# EAGLE board RFID_Antenna-Panel (EAGLE 9.3.0)
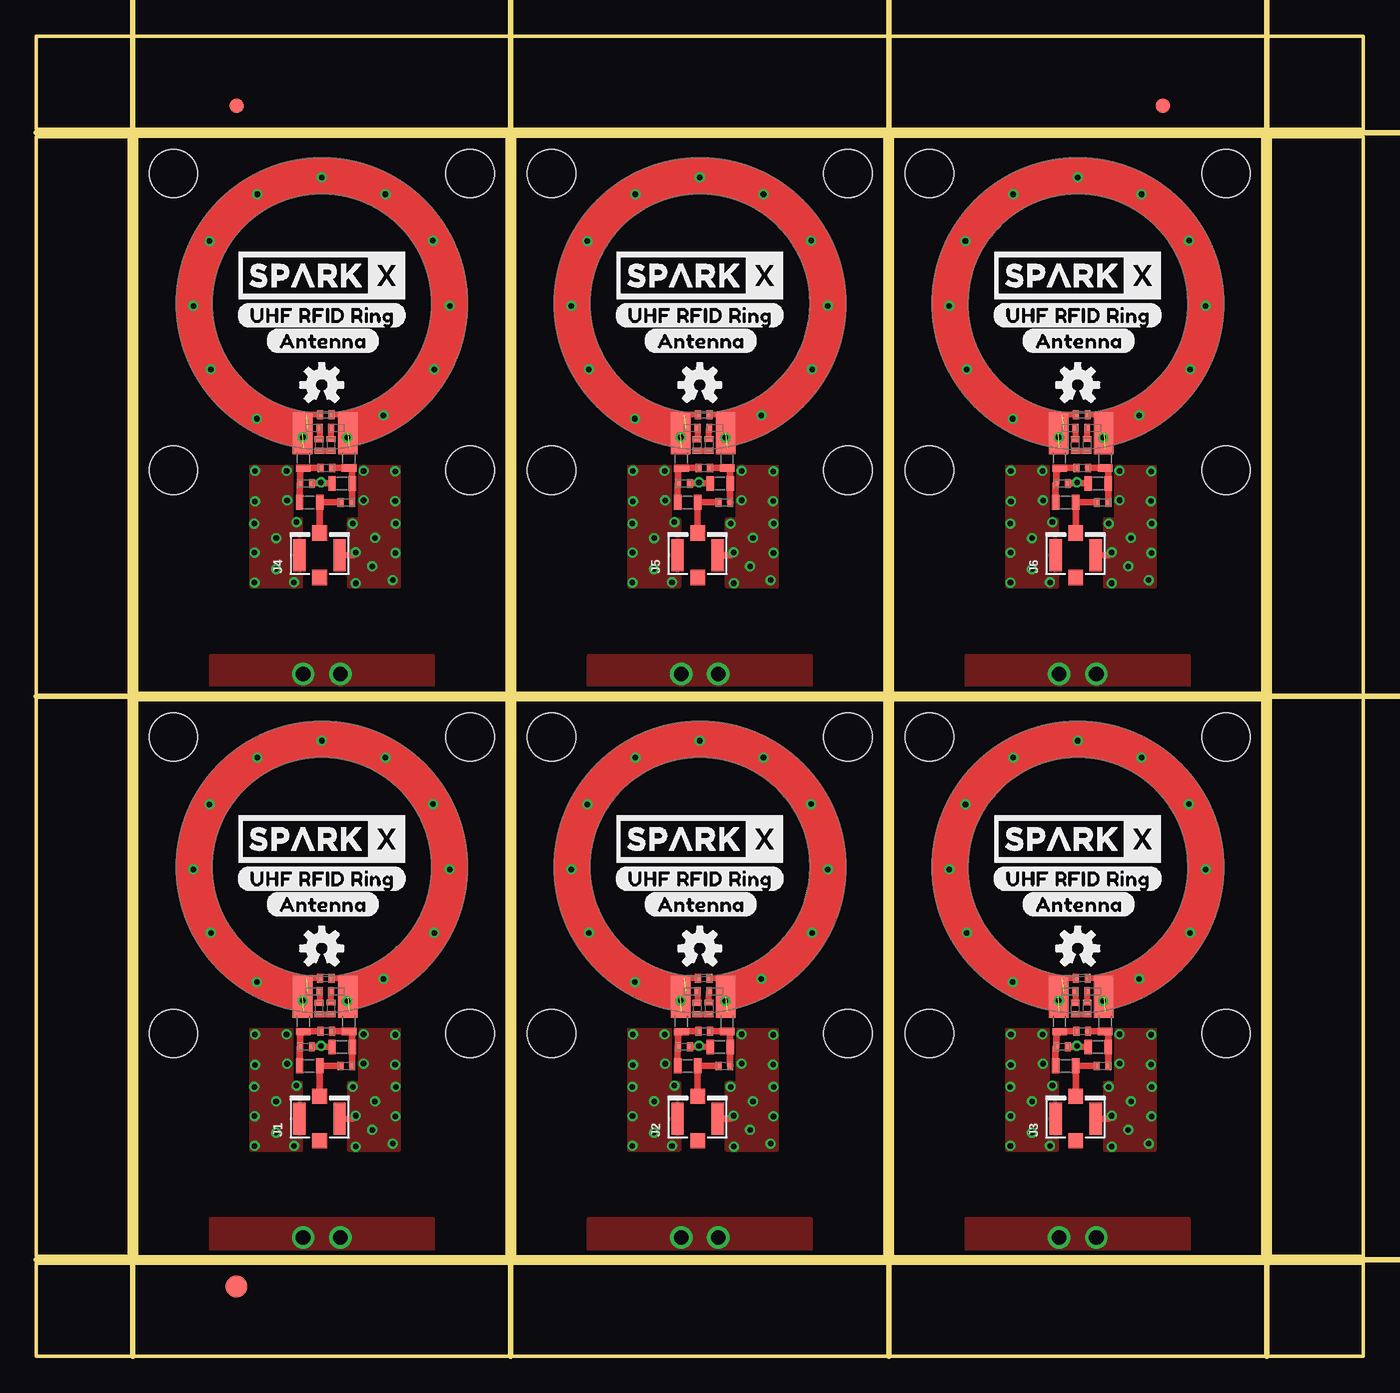
[diagram p0: board, top side]
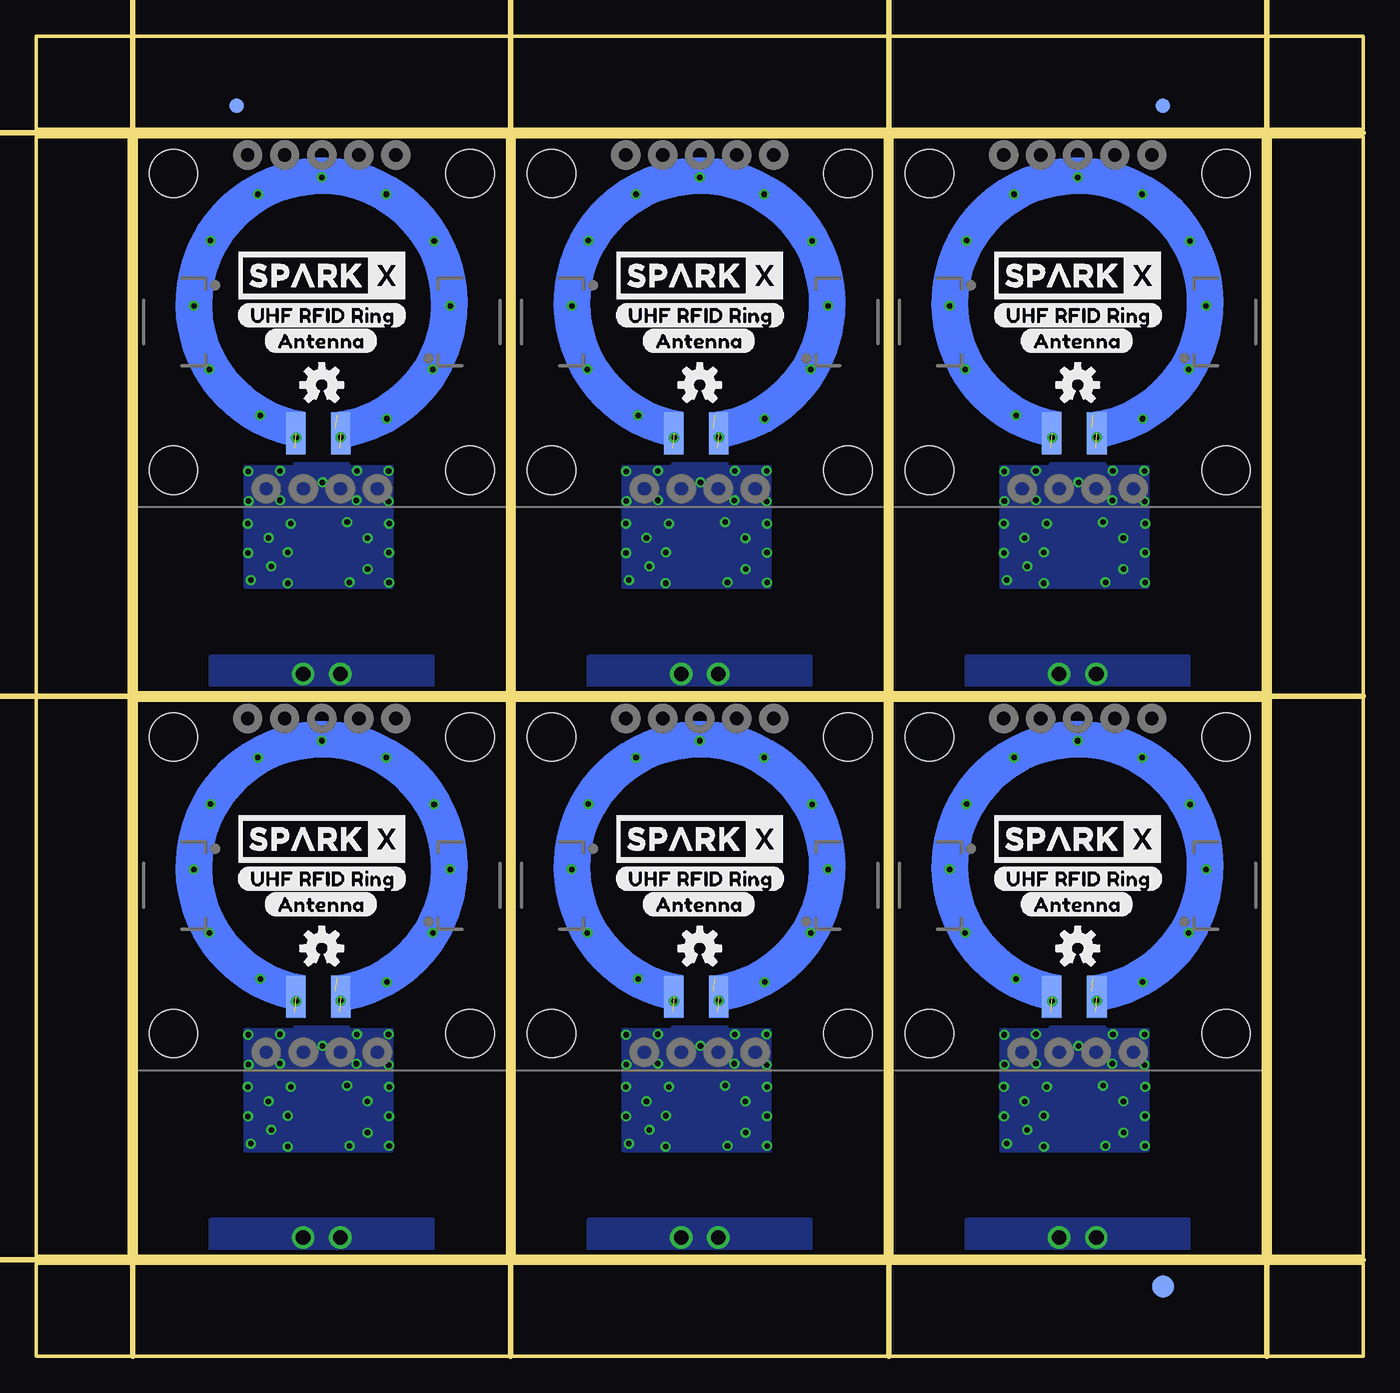
[diagram p1: board, bottom side, seen from below]

Size 90.93 x 90.42 mm. Coordinates in mm from the lower left corner, seen from the top.
Outline: 6.86,6.86 32.26,6.86 32.26,44.96 6.86,44.96 6.86,6.86
Outline: 32.77,6.86 58.17,6.86 58.17,44.96 32.77,44.96 32.77,6.86
Outline: 58.67,6.86 84.07,6.86 84.07,44.96 58.67,44.96 58.67,6.86
Outline: 6.86,45.47 32.26,45.47 32.26,83.57 6.86,83.57 6.86,45.47
Outline: 32.77,45.47 58.17,45.47 58.17,83.57 32.77,83.57 32.77,45.47
Outline: 58.67,45.47 84.07,45.47 84.07,83.57 58.67,83.57 58.67,45.47
Outline: 0,6.35 90.93,6.35 90.93,0 0,0 0,6.35
Outline: 84.58,83.57 90.93,83.57 90.93,6.86 84.58,6.86 84.58,83.57
Outline: 0,90.42 90.93,90.42 90.93,84.07 0,84.07 0,90.42
Outline: 0,83.57 6.35,83.57 6.35,6.86 0,6.86 0,83.57
Copper layers (1*16): Top 0.035mm / dielectric 1.5mm / Bottom 0.035mm
Design rules "SparkFun-2-layer-PCBWay-LIMIT": minimum track width 6mil, minimum drill 0.3mm, track to track 6mil, track to pad 6mil, pad to pad 6mil, via to via 6mil, smd to smd 6mil, copper to edge 6mil, drill to drill 6mil, minimum pad ring 6mil, minimum via ring 6mil, stop-mask expansion 4mil, vias tented up to drill 25mil, thermal gap 10mil
Milling: 7 lines

## Footprints (pad centres in the part's own frame; a part is rotated, then mirrored left to right if it is on the bottom)
0402_MURATA = smd 0.4 x 0.6: P$1 -0.4,0; P$2 0.4,0
FIDUCIAL-1X2 = smd 1 x 1: 1 0,0
FIDUCIAL-1.5X3 = smd 1.5 x 1.5: 1 0,0
U.FL = smd 2.2 x 0.85: 1 0,1.375; 2 0,-1.375 | smd 1.05 x 1: FEED 1.525,0; NC -1.525,0
0603_MURATA = smd 0.5 x 1: P$1 -0.7,0; P$2 0.675,0
ANT = smd 1.35 x 2.9 bottom: P$1 -1.32,-8.895; P$2 1.77,-8.895 | smd 1.35 x 2.9: P$3 -1.32,-8.895; P$4 1.77,-8.895
QWIIC_BOARD_MOUNT_HOLES = hole 3.302: -10.16,10.16; 10.16,10.16; 10.16,-10.16; -10.16,-10.16

## Placement (x,y rotation side)
C1  5.0 pF  [0402_MURATA]  19,24.99 0 top
C2  5.0 pF  [0402_MURATA]  20.6,24.98 0 top
C3  5.0 pF  [0402_MURATA]  19.38,23.82 270 top
C4  5.0 pF  [0402_MURATA]  20.2,23.83 270 top
C5  2.4 pF  [0402_MURATA]  18.48,21.19 180 top
C6  2.4 pF  [0402_MURATA]  21.25,19.88 180 top
C7  5.0 pF  [0402_MURATA]  44.91,24.99 0 top
C8  5.0 pF  [0402_MURATA]  46.51,24.98 0 top
C9  5.0 pF  [0402_MURATA]  45.29,23.82 270 top
C10  5.0 pF  [0402_MURATA]  46.11,23.83 270 top
C11  2.4 pF  [0402_MURATA]  44.39,21.19 180 top
C12  2.4 pF  [0402_MURATA]  47.16,19.88 180 top
C13  5.0 pF  [0402_MURATA]  70.82,24.99 0 top
C14  5.0 pF  [0402_MURATA]  72.42,24.98 0 top
C15  5.0 pF  [0402_MURATA]  71.19,23.82 270 top
C16  5.0 pF  [0402_MURATA]  72.02,23.83 270 top
C17  2.4 pF  [0402_MURATA]  70.3,21.19 180 top
C18  2.4 pF  [0402_MURATA]  73.07,19.88 180 top
C19  5.0 pF  [0402_MURATA]  19,63.6 0 top
C20  5.0 pF  [0402_MURATA]  20.6,63.59 0 top
C21  5.0 pF  [0402_MURATA]  19.38,62.43 270 top
C22  5.0 pF  [0402_MURATA]  20.2,62.44 270 top
C23  2.4 pF  [0402_MURATA]  18.48,59.8 180 top
C24  2.4 pF  [0402_MURATA]  21.25,58.49 180 top
C25  5.0 pF  [0402_MURATA]  44.91,63.6 0 top
C26  5.0 pF  [0402_MURATA]  46.51,63.59 0 top
C27  5.0 pF  [0402_MURATA]  45.29,62.43 270 top
C28  5.0 pF  [0402_MURATA]  46.11,62.44 270 top
C29  2.4 pF  [0402_MURATA]  44.39,59.8 180 top
C30  2.4 pF  [0402_MURATA]  47.16,58.49 180 top
C31  5.0 pF  [0402_MURATA]  70.82,63.6 0 top
C32  5.0 pF  [0402_MURATA]  72.42,63.59 0 top
C33  5.0 pF  [0402_MURATA]  71.19,62.43 270 top
C34  5.0 pF  [0402_MURATA]  72.02,62.44 270 top
C35  2.4 pF  [0402_MURATA]  70.3,59.8 180 top
C36  2.4 pF  [0402_MURATA]  73.07,58.49 180 top
E$1  [FIDUCIAL-1X2]  13.72,85.66 0 top
E$2  [FIDUCIAL-1X2]  13.72,85.66 0 bottom
E$3  [FIDUCIAL-1X2]  77.22,85.66 0 top
E$4  [FIDUCIAL-1X2]  77.22,85.66 0 bottom
E$5  [FIDUCIAL-1.5X3]  13.72,4.76 0 top
E$6  [FIDUCIAL-1.5X3]  13.72,4.76 0 bottom
FRAME1  FRAME-LETTER  [CREATIVE_COMMONS]  -8.38,-59.18 0 top  (outside the outline)
FRAME2  FRAME-LETTER  [CREATIVE_COMMONS]  17.53,-59.18 0 top  (outside the outline)
FRAME3  FRAME-LETTER  [CREATIVE_COMMONS]  43.43,-59.18 0 top  (outside the outline)
FRAME4  FRAME-LETTER  [CREATIVE_COMMONS]  -8.38,-20.57 0 top  (outside the outline)
FRAME5  FRAME-LETTER  [CREATIVE_COMMONS]  17.53,-20.57 0 top  (outside the outline)
FRAME6  FRAME-LETTER  [CREATIVE_COMMONS]  43.43,-20.57 0 top  (outside the outline)
J1  U.FL  [U.FL]  19.41,16.28 90 top
J2  U.FL  [U.FL]  45.32,16.28 90 top
J3  U.FL  [U.FL]  71.22,16.28 90 top
J4  U.FL  [U.FL]  19.41,54.88 90 top
J5  U.FL  [U.FL]  45.32,54.88 90 top
J6  U.FL  [U.FL]  71.22,54.88 90 top
L1  19 nH  [0402_MURATA]  19.87,22.25 0 top
L2  24 nH  [0603_MURATA]  18.31,22.93 90 top
L3  24 nH  [0603_MURATA]  21.43,22.94 90 top
L4  11 nH  [0603_MURATA]  20.94,21.19 180 top
L5  11 nH  [0603_MURATA]  18.72,19.9 180 top
L6  19 nH  [0402_MURATA]  45.78,22.25 0 top
L7  24 nH  [0603_MURATA]  44.22,22.93 90 top
L8  24 nH  [0603_MURATA]  47.34,22.94 90 top
L9  11 nH  [0603_MURATA]  46.85,21.19 180 top
L10  11 nH  [0603_MURATA]  44.63,19.9 180 top
L11  19 nH  [0402_MURATA]  71.68,22.25 0 top
L12  24 nH  [0603_MURATA]  70.12,22.93 90 top
L13  24 nH  [0603_MURATA]  73.25,22.94 90 top
L14  11 nH  [0603_MURATA]  72.76,21.19 180 top
L15  11 nH  [0603_MURATA]  70.53,19.9 180 top
L16  19 nH  [0402_MURATA]  19.87,60.86 0 top
L17  24 nH  [0603_MURATA]  18.31,61.54 90 top
L18  24 nH  [0603_MURATA]  21.43,61.55 90 top
L19  11 nH  [0603_MURATA]  20.94,59.79 180 top
L20  11 nH  [0603_MURATA]  18.72,58.51 180 top
L21  19 nH  [0402_MURATA]  45.78,60.86 0 top
L22  24 nH  [0603_MURATA]  44.22,61.54 90 top
L23  24 nH  [0603_MURATA]  47.34,61.55 90 top
L24  11 nH  [0603_MURATA]  46.85,59.79 180 top
L25  11 nH  [0603_MURATA]  44.63,58.51 180 top
L26  19 nH  [0402_MURATA]  71.68,60.86 0 top
L27  24 nH  [0603_MURATA]  70.12,61.54 90 top
L28  24 nH  [0603_MURATA]  73.25,61.55 90 top
L29  11 nH  [0603_MURATA]  72.76,59.79 180 top
L30  11 nH  [0603_MURATA]  70.53,58.51 180 top
R1  4.28k  [0402_MURATA]  19.83,25.9 0 top
R2  4.28k  [0402_MURATA]  45.74,25.9 0 top
R3  4.28k  [0402_MURATA]  71.65,25.9 0 top
R4  4.28k  [0402_MURATA]  19.83,64.51 0 top
R5  4.28k  [0402_MURATA]  45.74,64.51 0 top
R6  4.28k  [0402_MURATA]  71.65,64.51 0 top
U$1  ANTENNA  [ANT]  19.57,33.52 0 top
U$2  ANTENNA  [ANT]  45.48,33.52 0 top
U$3  [SPARKX-LARGE]  19.56,35.43 0 top
U$4  [SPARKX-LARGE]  19.56,35.43 0 bottom
U$5  [UHF_RFID_RING0]  13.69,32.72 0 top
U$6  [UHF_RFID_RING0]  25.4,32.72 0 bottom
U$7  [ANTENNA1]  15.72,30.96 0 top
U$8  [ANTENNA1]  23.52,30.96 0 bottom
U$9  [OSHW-LOGO-S]  19.56,27.94 0 bottom
U$10  [OSHW-LOGO-S]  19.56,27.94 0 top
U$11  [QWIIC_BOARD_MOUNT_HOLES]  19.56,32.26 0 bottom
U$12  SPARKX-LOGO6  [SPARKX-XLARGE]  -14.73,-64.26 0 top  (outside the outline)
U$13  [SPARKX-LARGE]  45.47,35.43 0 top
U$14  [SPARKX-LARGE]  45.47,35.43 0 bottom
U$15  [UHF_RFID_RING0]  39.6,32.72 0 top
U$16  [UHF_RFID_RING0]  51.31,32.72 0 bottom
U$17  [ANTENNA1]  41.63,30.96 0 top
U$18  [ANTENNA1]  49.43,30.96 0 bottom
U$19  [OSHW-LOGO-S]  45.47,27.94 0 bottom
U$20  [OSHW-LOGO-S]  45.47,27.94 0 top
U$21  [QWIIC_BOARD_MOUNT_HOLES]  45.47,32.26 0 bottom
U$22  SPARKX-LOGO6  [SPARKX-XLARGE]  11.18,-64.26 0 top  (outside the outline)
U$23  ANTENNA  [ANT]  71.39,33.52 0 top
U$24  [SPARKX-LARGE]  71.37,35.43 0 top
U$25  [SPARKX-LARGE]  71.37,35.43 0 bottom
U$26  [UHF_RFID_RING0]  65.51,32.72 0 top
U$27  [UHF_RFID_RING0]  77.22,32.72 0 bottom
U$28  [ANTENNA1]  67.54,30.96 0 top
U$29  [ANTENNA1]  75.34,30.96 0 bottom
U$30  [OSHW-LOGO-S]  71.37,27.94 0 bottom
U$31  [OSHW-LOGO-S]  71.37,27.94 0 top
U$32  [QWIIC_BOARD_MOUNT_HOLES]  71.37,32.26 0 bottom
U$33  SPARKX-LOGO6  [SPARKX-XLARGE]  37.08,-64.26 0 top  (outside the outline)
U$34  ANTENNA  [ANT]  19.57,72.13 0 top
U$35  [SPARKX-LARGE]  19.56,74.04 0 top
U$36  [SPARKX-LARGE]  19.56,74.04 0 bottom
U$37  [UHF_RFID_RING0]  13.69,71.32 0 top
U$38  [UHF_RFID_RING0]  25.4,71.32 0 bottom
U$39  [ANTENNA1]  15.72,69.57 0 top
U$40  [ANTENNA1]  23.52,69.57 0 bottom
U$41  [OSHW-LOGO-S]  19.56,66.55 0 bottom
U$42  [OSHW-LOGO-S]  19.56,66.55 0 top
U$43  [QWIIC_BOARD_MOUNT_HOLES]  19.56,70.87 0 bottom
U$44  SPARKX-LOGO6  [SPARKX-XLARGE]  -14.73,-25.65 0 top  (outside the outline)
U$45  ANTENNA  [ANT]  45.48,72.13 0 top
U$46  [SPARKX-LARGE]  45.47,74.04 0 top
U$47  [SPARKX-LARGE]  45.47,74.04 0 bottom
U$48  [UHF_RFID_RING0]  39.6,71.32 0 top
U$49  [UHF_RFID_RING0]  51.31,71.32 0 bottom
U$50  [ANTENNA1]  41.63,69.57 0 top
U$51  [ANTENNA1]  49.43,69.57 0 bottom
U$52  [OSHW-LOGO-S]  45.47,66.55 0 bottom
U$53  [OSHW-LOGO-S]  45.47,66.55 0 top
U$54  [QWIIC_BOARD_MOUNT_HOLES]  45.47,70.87 0 bottom
U$55  SPARKX-LOGO6  [SPARKX-XLARGE]  11.18,-25.65 0 top  (outside the outline)
U$56  ANTENNA  [ANT]  71.39,72.13 0 top
U$57  [SPARKX-LARGE]  71.37,74.04 0 top
U$58  [SPARKX-LARGE]  71.37,74.04 0 bottom
U$59  [UHF_RFID_RING0]  65.51,71.32 0 top
U$60  [UHF_RFID_RING0]  77.22,71.32 0 bottom
U$61  [ANTENNA1]  67.54,69.57 0 top
U$62  [ANTENNA1]  75.34,69.57 0 bottom
U$63  [OSHW-LOGO-S]  71.37,66.55 0 bottom
U$64  [OSHW-LOGO-S]  71.37,66.55 0 top
U$65  [QWIIC_BOARD_MOUNT_HOLES]  71.37,70.87 0 bottom
U$66  SPARKX-LOGO6  [SPARKX-XLARGE]  37.08,-25.65 0 top  (outside the outline)

## Library data of the parts
C1-C36 L1-L30 R1-R6 U$1 U$2 U$23 U$34 U$45 U$56 = special_parts
E$1-E$4 U$9 U$10 U$19 U$20 U$30 U$31 U$41 U$42 U$52 U$53 U$63 U$64 = SparkFun-Aesthetics
E$5 E$6 = SparkFun-Retired
FRAME1-FRAME6 = SparkFun-Aesthetics; DESIGNER: Owen Lyke; REV: x02
J1-J6 = SparkFun-Connectors; PROD_ID: CONN-09193; SF_ID: WRL-09144
U$3 U$4 U$11-U$14 U$21 U$22 U$24 U$25 U$32 U$33 U$35 U$36 U$43 U$44 U$46 U$47 U$54 U$55 U$57 U$58 U$65 U$66 = SparkX
U$5-U$8 U$15-U$18 U$26-U$29 U$37-U$40 U$48-U$51 U$59-U$62 = buzzard_labels

## Nets
A1: C1.P$1 L2.P$2 R1.P$1 U$1.P$1 U$1.P$3
A2: C2.P$2 L3.P$2 R1.P$2 U$1.P$2 U$1.P$4
A3: C7.P$1 L7.P$2 R2.P$1 U$2.P$1 U$2.P$3
A4: C8.P$2 L8.P$2 R2.P$2 U$2.P$2 U$2.P$4
A5: C13.P$1 L12.P$2 R3.P$1 U$23.P$1 U$23.P$3
A6: C14.P$2 L13.P$2 R3.P$2 U$23.P$2 U$23.P$4
A7: C19.P$1 L17.P$2 R4.P$1 U$34.P$1 U$34.P$3
A8: C20.P$2 L18.P$2 R4.P$2 U$34.P$2 U$34.P$4
A9: C25.P$1 L22.P$2 R5.P$1 U$45.P$1 U$45.P$3
A10: C26.P$2 L23.P$2 R5.P$2 U$45.P$2 U$45.P$4
A11: C31.P$1 L27.P$2 R6.P$1 U$56.P$1 U$56.P$3
A12: C32.P$2 L28.P$2 R6.P$2 U$56.P$2 U$56.P$4
C1C1: C7.P$2 C9.P$1
C1C2: C13.P$2 C15.P$1
C1C3: C1.P$2 C3.P$1
C1C4: C19.P$2 C21.P$1
C1C5: C25.P$2 C27.P$1
C1C6: C31.P$2 C33.P$1
C2C1: C8.P$1 C10.P$1
C2C2: C14.P$1 C16.P$1
C2C3: C20.P$1 C22.P$1
C2C4: C2.P$1 C4.P$1
C2C5: C26.P$1 C28.P$1
C2C6: C32.P$1 C34.P$1
C3C1: C9.P$2 C10.P$2
C3C2: C15.P$2 C16.P$2
C3C3: C21.P$2 C22.P$2
C3C4: C3.P$2 C4.P$2
C3C5: C27.P$2 C28.P$2
C3C6: C33.P$2 C34.P$2
GND: C5.P$1 J1.1 J1.2 L4.P$2
GND2: C11.P$1 J2.1 J2.2 L9.P$2
GND4: C17.P$1 J3.1 J3.2 L14.P$2
GND6: C23.P$1 J4.1 J4.2 L19.P$2
GND8: C29.P$1 J5.1 J5.2 L24.P$2
GND10: C35.P$1 J6.1 J6.2 L29.P$2
L5C1: C12.P$2 J2.FEED L10.P$1
L5C2: C18.P$2 J3.FEED L15.P$1
L5C3: C24.P$2 J4.FEED L20.P$1
L5C4: C30.P$2 J5.FEED L25.P$1
L5C5: C36.P$2 J6.FEED L30.P$1
L5C6: C6.P$2 J1.FEED L5.P$1
N$1: C12.P$1 L6.P$2 L8.P$1 L9.P$1
N$2: C11.P$2 L6.P$1 L7.P$1 L10.P$2
N$6: C6.P$1 L1.P$2 L3.P$1 L4.P$1
N$7: C5.P$2 L1.P$1 L2.P$1 L5.P$2
N$18: C18.P$1 L11.P$2 L13.P$1 L14.P$1
N$19: C17.P$2 L11.P$1 L12.P$1 L15.P$2
N$46: C24.P$1 L16.P$2 L18.P$1 L19.P$1
N$47: C23.P$2 L16.P$1 L17.P$1 L20.P$2
N$61: C30.P$1 L21.P$2 L23.P$1 L24.P$1
N$62: C29.P$2 L21.P$1 L22.P$1 L25.P$2
N$76: C36.P$1 L26.P$2 L28.P$1 L29.P$1
N$77: C35.P$2 L26.P$1 L27.P$1 L30.P$2

## Tracks (layer width: path | path; a pad name or v marks a point on that pad's centre or on a via)
A1  (3 unrouted)
  Top 0.406: R1.P$1 18.53,25.9 18.51,25.88 | C1.P$1 U$1.P$3
A2  (2 unrouted)
  Top 0.406: R1.P$2 21.24,25.9 21.34,25.8 U$1.P$4 21,24.96 C2.P$2
A3  (3 unrouted)
  Top 0.406: R2.P$1 44.44,25.9 44.42,25.88 | C7.P$1 U$2.P$3
A4  (2 unrouted)
  Top 0.406: R2.P$2 47.14,25.9 47.25,25.8 U$2.P$4 46.91,24.96 C8.P$2
A5  (3 unrouted)
  Top 0.406: R3.P$1 70.35,25.9 70.32,25.88 | C13.P$1 U$23.P$3
A6  (2 unrouted)
  Top 0.406: R3.P$2 73.05,25.9 73.16,25.8 U$23.P$4 72.82,24.96 C14.P$2
A7  (3 unrouted)
  Top 0.406: R4.P$1 18.53,64.51 18.51,64.49 | C19.P$1 U$34.P$3
A8  (2 unrouted)
  Top 0.406: R4.P$2 21.24,64.51 21.34,64.41 U$34.P$4 21,63.57 C20.P$2
A9  (3 unrouted)
  Top 0.406: R5.P$1 44.44,64.51 44.42,64.49 | C25.P$1 U$45.P$3
A10  (2 unrouted)
  Top 0.406: R5.P$2 47.14,64.51 47.25,64.41 U$45.P$4 46.91,63.57 C26.P$2
A11  (3 unrouted)
  Top 0.406: R6.P$1 70.35,64.51 70.32,64.49 | C31.P$1 U$56.P$3
A12  (2 unrouted)
  Top 0.406: R6.P$2 73.05,64.51 73.16,64.41 U$56.P$4 72.82,63.57 C32.P$2
C1C1
  Top 0.406: C7.P$2 45.31,24.25 C9.P$1
C1C2
  Top 0.406: C13.P$2 71.22,24.25 C15.P$1
C1C3
  Top 0.406: C1.P$2 19.4,24.25 C3.P$1
C1C4
  Top 0.406: C19.P$2 19.4,62.86 C21.P$1
C1C5
  Top 0.406: C25.P$2 45.31,62.86 C27.P$1
C1C6
  Top 0.406: C31.P$2 71.22,62.86 C33.P$1
C2C1
  Top 0.406: C10.P$1 C8.P$1
C2C2
  Top 0.406: C16.P$1 C14.P$1
C2C3
  Top 0.406: C22.P$1 C20.P$1
C2C4
  Top 0.406: C4.P$1 C2.P$1
C2C5
  Top 0.406: C28.P$1 C26.P$1
C2C6
  Top 0.406: C34.P$1 C32.P$1
C3C1
  Top 0.406: C9.P$2 46.1,23.42 C10.P$2
C3C2
  Top 0.406: C15.P$2 72.01,23.42 C16.P$2
C3C3
  Top 0.406: C21.P$2 C22.P$2
C3C4
  Top 0.406: C3.P$2 20.19,23.42 C4.P$2
C3C5
  Top 0.406: C27.P$2 46.1,62.03 C28.P$2
C3C6
  Top 0.406: C33.P$2 72.01,62.03 C34.P$2
GND  (via drill 0.38)
  Top 0.457: L4.P$2 19.57,21.19 | v19.51,21.25 19.44,21.19 19.57,21.19 | C5.P$1 19.56,21.19 19.57,21.19 | J1.2 21.69,16.28 v21.88,16.47
  other vias: 14.98,22.04 17.15,22.04 17.18,20.03 14.98,19.96 14.94,18.44 14.95,16.45 16.43,17.45 17.82,18.53 14.94,14.4 16.42,15.31 17.66,14.41 21.89,14.35 23.02,15.5 23.21,17.45 21.68,18.44 22.43,20.04 22.43,22.05 24.6,22.02 24.58,19.97 24.62,18.44 24.61,16.42 24.42,14.56
  pour Top: 14.71,22.53 17.51,22.53 17.51,18.78 18.16,18.78 18.16,14.08 14.71,14.08
  pour Top: 21.41,18.78 22.16,18.78 22.16,22.53 24.86,22.53 24.86,14.08 21.41,14.08
  pour Bottom: 14.71,22.53 24.86,22.53 24.86,18.43 24.86,14.08 14.71,14.08
GND1  (via drill 1.02)
  other vias: 20.83,8.13 18.29,8.13
  pour Bottom (isolate 0.305): 11.94,9.4 11.94,6.86 27.18,6.86 27.18,9.4
  pour Top (isolate 0.305): 11.94,9.4 11.94,6.86 27.18,6.86 27.18,9.4
GND2  (via drill 0.38)
  Top 0.457: L9.P$2 45.47,21.19 | v45.41,21.25 45.35,21.19 45.47,21.19 | C11.P$1 45.47,21.19 | J2.2 47.6,16.28 v47.79,16.47
  other vias: 40.89,22.04 43.06,22.04 43.09,20.03 40.89,19.96 40.85,18.44 40.86,16.45 42.34,17.45 43.73,18.53 40.85,14.4 42.33,15.31 43.57,14.41 47.8,14.35 48.93,15.5 49.12,17.45 47.59,18.44 48.33,20.04 48.34,22.05 50.51,22.02 50.49,19.97 50.53,18.44 50.52,16.42 50.33,14.56
  pour Top: 40.62,22.53 43.42,22.53 43.42,18.78 44.07,18.78 44.07,14.08 40.62,14.08
  pour Top: 47.32,18.78 48.07,18.78 48.07,22.53 50.77,22.53 50.77,14.08 47.32,14.08
  pour Bottom: 40.62,22.53 50.77,22.53 50.77,18.43 50.77,14.08 40.62,14.08
GND3  (via drill 1.02)
  other vias: 46.74,8.13 44.2,8.13
  pour Bottom (isolate 0.305): 37.85,9.4 37.85,6.86 53.09,6.86 53.09,9.4
  pour Top (isolate 0.305): 37.85,9.4 37.85,6.86 53.09,6.86 53.09,9.4
GND4  (via drill 0.38)
  Top 0.457: L14.P$2 71.38,21.19 | v71.32,21.25 71.26,21.19 71.38,21.19 | C17.P$1 71.38,21.19 | J3.2 73.51,16.28 v73.7,16.47
  other vias: 66.79,22.04 68.96,22.04 69,20.03 66.79,19.96 66.75,18.44 66.76,16.45 68.24,17.45 69.64,18.53 66.76,14.4 68.23,15.31 69.47,14.41 73.71,14.35 74.83,15.5 75.02,17.45 73.49,18.44 74.24,20.04 74.24,22.05 76.41,22.02 76.4,19.97 76.44,18.44 76.43,16.42 76.23,14.56
  pour Top: 66.52,22.53 69.32,22.53 69.32,18.78 69.97,18.78 69.97,14.08 66.52,14.08
  pour Top: 73.22,18.78 73.97,18.78 73.97,22.53 76.67,22.53 76.67,14.08 73.22,14.08
  pour Bottom: 66.52,22.53 76.67,22.53 76.67,18.43 76.67,14.08 66.52,14.08
GND5  (via drill 1.02)
  other vias: 72.64,8.13 70.1,8.13
  pour Bottom (isolate 0.305): 63.75,9.4 63.75,6.86 78.99,6.86 78.99,9.4
  pour Top (isolate 0.305): 63.75,9.4 63.75,6.86 78.99,6.86 78.99,9.4
GND6  (via drill 0.38)
  Top 0.457: L19.P$2 19.57,59.79 | v19.51,59.86 19.44,59.79 19.57,59.79 | C23.P$1 19.56,59.8 19.57,59.79 | J4.2 21.69,54.88 v21.88,55.08
  other vias: 14.98,60.65 17.15,60.65 17.18,58.64 14.98,58.57 14.94,57.05 14.95,55.06 16.43,56.06 17.82,57.14 14.94,53.01 16.42,53.92 17.66,53.02 21.89,52.96 23.02,54.11 23.21,56.06 21.68,57.05 22.43,58.65 22.43,60.66 24.6,60.63 24.58,58.58 24.62,57.05 24.61,55.03 24.42,53.17
  pour Top: 14.71,61.14 17.51,61.14 17.51,57.39 18.16,57.39 18.16,52.69 14.71,52.69
  pour Top: 21.41,57.39 22.16,57.39 22.16,61.14 24.86,61.14 24.86,52.69 21.41,52.69
  pour Bottom: 14.71,61.14 24.86,61.14 24.86,57.04 24.86,52.69 14.71,52.69
GND7  (via drill 1.02)
  other vias: 20.83,46.74 18.29,46.74
  pour Bottom (isolate 0.305): 11.94,48.01 11.94,45.47 27.18,45.47 27.18,48.01
  pour Top (isolate 0.305): 11.94,48.01 11.94,45.47 27.18,45.47 27.18,48.01
GND8  (via drill 0.38)
  Top 0.457: L24.P$2 45.47,59.79 | v45.41,59.86 45.35,59.79 45.47,59.79 | C29.P$1 45.47,59.8 45.47,59.79 | J5.2 47.6,54.88 v47.79,55.08
  other vias: 40.89,60.65 43.06,60.65 43.09,58.64 40.89,58.57 40.85,57.05 40.86,55.06 42.34,56.06 43.73,57.14 40.85,53.01 42.33,53.92 43.57,53.02 47.8,52.96 48.93,54.11 49.12,56.06 47.59,57.05 48.33,58.65 48.34,60.66 50.51,60.63 50.49,58.58 50.53,57.05 50.52,55.03 50.33,53.17
  pour Top: 40.62,61.14 43.42,61.14 43.42,57.39 44.07,57.39 44.07,52.69 40.62,52.69
  pour Top: 47.32,57.39 48.07,57.39 48.07,61.14 50.77,61.14 50.77,52.69 47.32,52.69
  pour Bottom: 40.62,61.14 50.77,61.14 50.77,57.04 50.77,52.69 40.62,52.69
GND9  (via drill 1.02)
  other vias: 46.74,46.74 44.2,46.74
  pour Bottom (isolate 0.305): 37.85,48.01 37.85,45.47 53.09,45.47 53.09,48.01
  pour Top (isolate 0.305): 37.85,48.01 37.85,45.47 53.09,45.47 53.09,48.01
GND10  (via drill 0.38)
  Top 0.457: L29.P$2 71.38,59.79 | v71.32,59.86 71.26,59.79 71.38,59.79 | C35.P$1 71.38,59.8 71.38,59.79 | J6.2 73.51,54.88 v73.7,55.08
  other vias: 66.79,60.65 68.96,60.65 69,58.64 66.79,58.57 66.75,57.05 66.76,55.06 68.24,56.06 69.64,57.14 66.76,53.01 68.23,53.92 69.47,53.02 73.71,52.96 74.83,54.11 75.02,56.06 73.49,57.05 74.24,58.65 74.24,60.66 76.41,60.63 76.4,58.58 76.44,57.05 76.43,55.03 76.23,53.17
  pour Top: 66.52,61.14 69.32,61.14 69.32,57.39 69.97,57.39 69.97,52.69 66.52,52.69
  pour Top: 73.22,57.39 73.97,57.39 73.97,61.14 76.67,61.14 76.67,52.69 73.22,52.69
  pour Bottom: 66.52,61.14 76.67,61.14 76.67,57.04 76.67,52.69 66.52,52.69
GND11  (via drill 1.02)
  other vias: 72.64,46.74 70.1,46.74
  pour Bottom (isolate 0.305): 63.75,48.01 63.75,45.47 78.99,45.47 78.99,48.01
  pour Top (isolate 0.305): 63.75,48.01 63.75,45.47 78.99,45.47 78.99,48.01
L5C1
  Top 0.457: C12.P$2 46.75,19.9 L10.P$1 45.32,17.81 J2.FEED
L5C2
  Top 0.457: C18.P$2 72.65,19.9 L15.P$1 71.23,17.81 J3.FEED
L5C3
  Top 0.457: C24.P$2 20.84,58.5 L20.P$1 J4.FEED
L5C4
  Top 0.457: C30.P$2 46.75,58.5 L25.P$1 J5.FEED
L5C5
  Top 0.457: C36.P$2 72.65,58.5 L30.P$1 J6.FEED
L5C6
  Top 0.457: C6.P$2 20.84,19.9 L5.P$1 19.42,17.81 J1.FEED
N$1
  Top 0.457: L6.P$2 47.33,22.25 L8.P$1 47.55,22.03 L9.P$1 47.55,19.89 C12.P$1
N$2
  Top 0.457: L6.P$1 44.24,22.25 L7.P$1 43.99,22 C11.P$2 43.95,21.16 L10.P$2
N$3  (via drill 0.38)
  other vias: 36.67,33.35
N$4  (via drill 0.38)
  other vias: 37.87,29
N$5  (via drill 0.38)
  other vias: 41.02,25.62
N$6
  Top 0.457: L1.P$2 21.42,22.25 L3.P$1 21.64,22.03 L4.P$1 21.64,19.89 C6.P$1
N$7
  Top 0.457: L1.P$1 18.33,22.25 L2.P$1 18.08,22 C5.P$2 18.04,21.16 L5.P$2
N$8  (via drill 0.38)
  other vias: 44.16,24.35
N$9  (via drill 0.38)
  other vias: 47.22,24.33
N$10  (via drill 0.38)
  other vias: 49.69,25.86
N$11  (via drill 0.38)
  other vias: 53.17,29
N$12  (via drill 0.38)
  other vias: 54.24,33.35
N$13  (via drill 0.38)
  other vias: 53.09,37.82
N$14  (via drill 0.38)
  other vias: 49.83,41
N$15  (via drill 0.38)
  other vias: 45.47,42.16
N$16  (via drill 0.38)
  other vias: 41.05,41
N$17  (via drill 0.38)
  other vias: 37.77,37.8
N$18
  Top 0.457: L11.P$2 73.23,22.25 L13.P$1 73.46,22.03 L14.P$1 73.46,19.89 C18.P$1
N$19
  Top 0.457: L11.P$1 70.15,22.25 L12.P$1 69.89,22 C17.P$2 69.86,21.16 L15.P$2
N$20  (via drill 0.38)
  other vias: 62.57,33.35
N$21  (via drill 0.38)
  other vias: 63.77,29
N$22  (via drill 0.38)
  other vias: 66.92,25.62
N$23  (via drill 0.38)
  other vias: 70.07,24.35
N$24  (via drill 0.38)
  other vias: 73.12,24.33
N$25  (via drill 0.38)
  other vias: 75.6,25.86
N$26  (via drill 0.38)
  other vias: 79.08,29
N$27  (via drill 0.38)
  other vias: 10.76,33.35
N$28  (via drill 0.38)
  other vias: 11.96,29
N$29  (via drill 0.38)
  other vias: 15.11,25.62
N$30  (via drill 0.38)
  other vias: 18.26,24.35
N$31  (via drill 0.38)
  other vias: 21.31,24.33
N$32  (via drill 0.38)
  other vias: 23.78,25.86
N$33  (via drill 0.38)
  other vias: 27.26,29
N$34  (via drill 0.38)
  other vias: 28.34,33.35
N$35  (via drill 0.38)
  other vias: 27.19,37.82
N$36  (via drill 0.38)
  other vias: 23.93,41
N$37  (via drill 0.38)
  other vias: 19.56,42.16
N$38  (via drill 0.38)
  other vias: 15.14,41
N$39  (via drill 0.38)
  other vias: 11.86,37.8
N$40  (via drill 0.38)
  other vias: 80.15,33.35
N$41  (via drill 0.38)
  other vias: 79,37.82
N$42  (via drill 0.38)
  other vias: 75.74,41
N$43  (via drill 0.38)
  other vias: 71.37,42.16
N$44  (via drill 0.38)
  other vias: 66.95,41
N$45  (via drill 0.38)
  other vias: 63.67,37.8
N$46
  Top 0.457: L16.P$2 21.42,60.86 L18.P$1 21.64,60.63 L19.P$1 21.64,58.5 C24.P$1
N$47
  Top 0.457: L16.P$1 18.33,60.86 L17.P$1 18.08,60.61 C23.P$2 18.04,59.76 L20.P$2
N$48  (via drill 0.38)
  other vias: 10.76,71.96
N$49  (via drill 0.38)
  other vias: 11.96,67.61
N$50  (via drill 0.38)
  other vias: 15.11,64.23
N$51  (via drill 0.38)
  other vias: 18.26,62.96
N$52  (via drill 0.38)
  other vias: 21.31,62.94
N$53  (via drill 0.38)
  other vias: 23.78,64.46
N$54  (via drill 0.38)
  other vias: 27.26,67.61
N$55  (via drill 0.38)
  other vias: 28.34,71.96
N$56  (via drill 0.38)
  other vias: 27.19,76.43
N$57  (via drill 0.38)
  other vias: 23.93,79.61
N$58  (via drill 0.38)
  other vias: 19.56,80.77
N$59  (via drill 0.38)
  other vias: 15.14,79.61
N$60  (via drill 0.38)
  other vias: 11.86,76.41
N$61
  Top 0.457: L21.P$2 47.33,60.86 L23.P$1 47.55,60.63 L24.P$1 C30.P$1
N$62
  Top 0.457: L21.P$1 44.24,60.86 L22.P$1 43.99,60.61 C29.P$2 43.95,59.76 L25.P$2
N$63  (via drill 0.38)
  other vias: 36.67,71.96
N$64  (via drill 0.38)
  other vias: 37.87,67.61
N$65  (via drill 0.38)
  other vias: 41.02,64.23
N$66  (via drill 0.38)
  other vias: 44.16,62.96
N$67  (via drill 0.38)
  other vias: 47.22,62.94
N$68  (via drill 0.38)
  other vias: 49.69,64.46
N$69  (via drill 0.38)
  other vias: 53.17,67.61
N$70  (via drill 0.38)
  other vias: 54.24,71.96
N$71  (via drill 0.38)
  other vias: 53.09,76.43
N$72  (via drill 0.38)
  other vias: 49.83,79.61
N$73  (via drill 0.38)
  other vias: 45.47,80.77
N$74  (via drill 0.38)
  other vias: 41.05,79.61
N$75  (via drill 0.38)
  other vias: 37.77,76.41
N$76
  Top 0.457: L26.P$2 73.23,60.86 L28.P$1 73.46,60.63 L29.P$1 C36.P$1
N$77
  Top 0.457: L26.P$1 70.15,60.86 L27.P$1 69.89,60.61 C35.P$2 69.86,59.76 L30.P$2
N$78  (via drill 0.38)
  other vias: 62.57,71.96
N$79  (via drill 0.38)
  other vias: 63.77,67.61
N$80  (via drill 0.38)
  other vias: 66.92,64.23
N$81  (via drill 0.38)
  other vias: 70.07,62.96
N$82  (via drill 0.38)
  other vias: 73.12,62.94
N$83  (via drill 0.38)
  other vias: 75.6,64.46
N$84  (via drill 0.38)
  other vias: 79.08,67.61
N$85  (via drill 0.38)
  other vias: 80.15,71.96
N$86  (via drill 0.38)
  other vias: 79,76.43
N$87  (via drill 0.38)
  other vias: 75.74,79.61
N$88  (via drill 0.38)
  other vias: 71.37,80.77
N$89  (via drill 0.38)
  other vias: 66.95,79.61
N$90  (via drill 0.38)
  other vias: 63.67,76.41

## Text on the board
Milling: v-score | v-score | v-score | v-score | v-score | v-score | v-score
tDocu: Owen Lyke | Owen Lyke | Owen Lyke | Owen Lyke | Owen Lyke | Owen Lyke